# EAGLE board plantshield_huzzah_2022 (EAGLE 9.6.2)
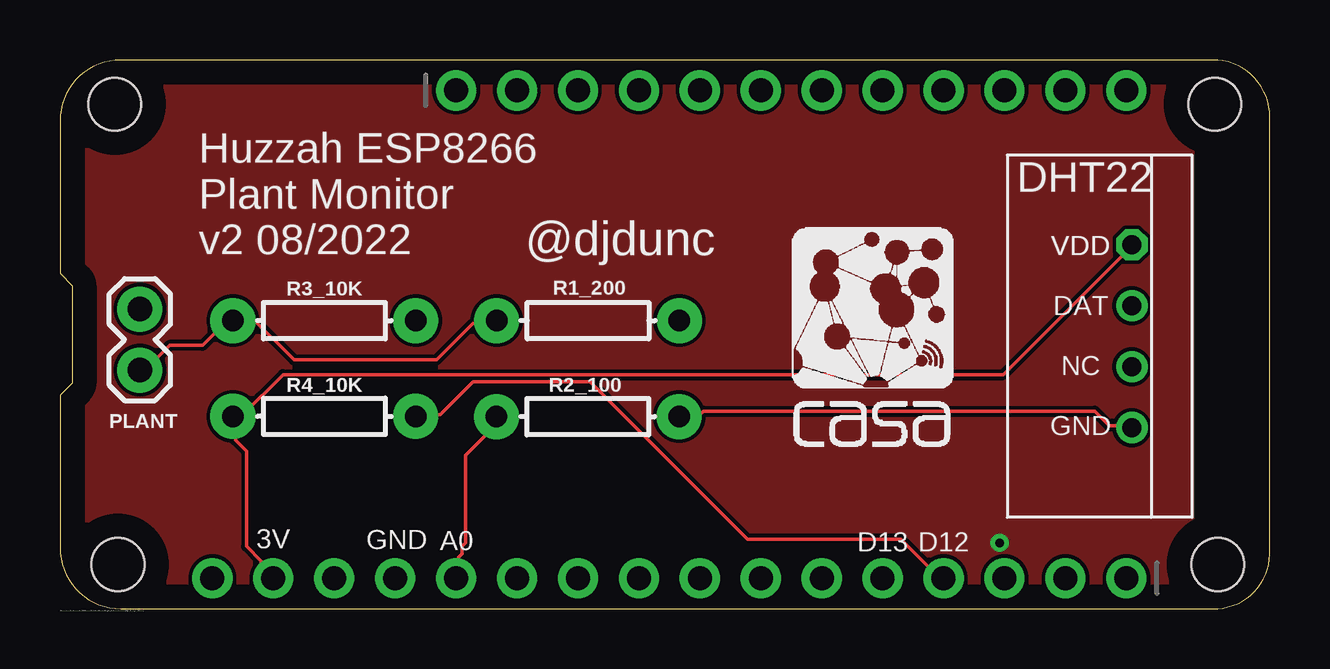
[diagram p0: board, top side]
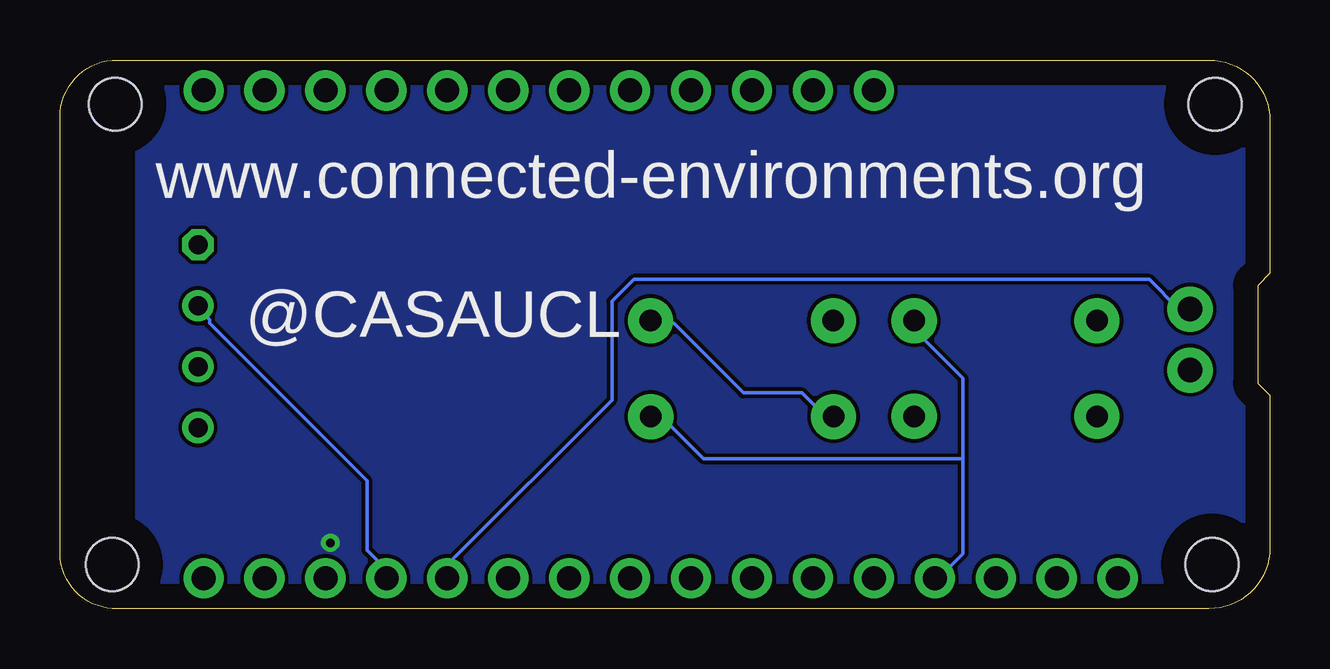
[diagram p1: board, bottom side, seen from below]

Size 50.43 x 22.86 mm. Coordinates in mm from the lower left corner, seen from the top.
Outline: 2.54,0 48.26,0 arc90 50.42,2.48 50.42,20.26 arc90 48.26,22.86 2.54,22.86 arc90 0,20.32 0,13.97 0.51,13.46 0.51,9.4 0,8.89 0,2.54 arc90 2.54,0
Copper layers (1*16): Top 0.035mm / dielectric 1.5mm / Bottom 0.035mm
Design rules "default": minimum track width 6mil, minimum drill 0.35mm, track to track 6mil, track to pad 6mil, pad to pad 6mil, via to via 6mil, smd to smd 6mil, copper to edge 40mil, drill to drill 6mil, minimum pad ring 10mil, minimum via ring 8mil, stop-mask expansion 4mil, vias tented up to drill 0mil, thermal gap 10mil
Holes 2.2 mm at 48.26,1.84 48.13,21.02 2.41,1.84 2.29,21.02

## Footprints (pad centres in the part's own frame; a part is rotated, then mirrored left to right if it is on the bottom)
RHT03_DHT-22 = drill 0.8: DATA -1.27,0; GND 3.81,0; NULL 1.27,0 | drill 0.8 octagon: VDD -3.81,0
1X16_ROUND = drill 1 pad 1.676: 1 -19.05,0; 2 -16.51,0; 3 -13.97,0; 4 -11.43,0; 5 -8.89,0; 6 -6.35,0; 7 -3.81,0; 8 -1.27,0; 9 1.27,0; 10 3.81,0; 11 6.35,0; 12 8.89,0; 13 11.43,0; 14 13.97,0; 15 16.51,0; 16 19.05,0
1X12_ROUND = drill 1 pad 1.676: 1 -13.97,0; 2 -11.43,0; 3 -8.89,0; 4 -6.35,0; 5 -3.81,0; 6 -1.27,0; 7 1.27,0; 8 3.81,0; 9 6.35,0; 10 8.89,0; 11 11.43,0; 12 13.97,0
1X02 = drill 1.016 pad 1.88: 1 0,0; 2 2.54,0
AXIAL-0.3 = drill 0.9 pad 1.88: P$1 -3.81,0; P$2 3.81,0

## Placement (x,y rotation side)
DHT22  [RHT03_DHT-22]  44.68,11.35 270 top
JP2  [1X16_ROUND]  25.4,1.27 180 top
JP4  [1X12_ROUND]  30.48,21.59 0 top
PLANT  [1X02]  3.33,9.94 90 top
R1_200  [AXIAL-0.3]  22.01,12 180 top
R2_100  100  [AXIAL-0.3]  22,8 180 top
R3_10K  10k  [AXIAL-0.3]  11.02,12 0 top
R4_10K  10k  [AXIAL-0.3]  11.02,8.01 0 top

## Library data of the parts
DHT22 = RHT03_DHT-22_AM2302; PROD_ID: SEN-10167
JP2 JP4 = microbuilder
PLANT = SparkFun-Connectors
R1_200 = SparkFun-Resistors
R2_100 = SparkFun-Resistors; PROD_ID: RES-12181
R3_10K R4_10K = SparkFun-Resistors; PROD_ID: RES-12183

## Nets
N$1: JP2.5 PLANT.2
N$2: DHT22.DATA JP2.4 R4_10K.P$2
N$3: JP2.12 R1_200.P$1 R2_100.P$2
N$4: DHT22.VDD JP2.15 R4_10K.P$1
N$5: PLANT.1 R1_200.P$2 R3_10K.P$1
N$6: DHT22.GND JP2.13 R2_100.P$1 R3_10K.P$2

## Tracks (layer width: path | path; a pad name or v marks a point on that pad's centre or on a via)
GND1  (via drill 0.35)
  other vias: 39.17,2.74
  pour Top: 0,23.48 0,0 47.18,0 47.18,23.48
  pour Bottom: -0.13,0.25 47.18,-0.02 47.18,23.48 0,23.48
N$1
  Bottom 0.152: JP2.5 34.29,1.83 27.43,8.69 27.43,12.8 26.52,13.72 5.03,13.72 3.81,12.5 3.35,12.5 PLANT.2
N$2
  Top 0.152: R4_10K.P$2 14.94,8.08 15.85,8.08 17.22,9.45 22.1,9.45 28.65,2.9 35.05,2.9 36.73,1.22 JP2.4
  Bottom 0.152: DHT22.DATA 44.65,12.5 44.2,12.04 44.2,11.89 37.64,5.33 37.64,2.44 36.88,1.68 36.88,1.37 JP2.4
N$3
  Top 0.152: JP2.12 16.61,1.37 16.61,2.13 16.76,2.29 16.76,2.59 16.92,2.74 16.92,6.4 18.14,7.62 18.14,7.92 R2_100.P$2
  Bottom 0.152: R1_200.P$1 25.76,11.89 24.84,11.89 21.95,8.99 19.51,8.99 18.59,8.08 18.29,8.08 R2_100.P$2
N$4
  Top 0.152: DHT22.VDD 44.65,15.09 39.32,9.75 9.3,9.75 7.62,8.08 7.32,8.08 R4_10K.P$1 7.32,7.92 7.32,7.01 7.77,6.55 7.77,2.59 8.38,1.98 8.38,1.83 8.84,1.37 JP2.15
N$5
  Top 0.152: PLANT.1 3.35,10.06 3.66,10.06 4.57,10.97 5.94,10.97 6.86,11.89 7.16,11.89 R3_10K.P$1 7.32,12.04 8.08,12.04 9.75,10.36 15.7,10.36 17.22,11.89 18.14,11.89 R1_200.P$2
N$6
  Top 0.152: DHT22.GND 44.65,7.62 43.74,7.62 43.13,8.23 26.82,8.23 26.67,8.08 25.91,8.08 R2_100.P$1
  Bottom 0.152: JP2.13 13.56,1.68 13.41,1.68 12.8,2.29 12.8,6.25 | 12.8,6.25 12.8,9.6 14.78,11.58 14.78,11.89 R3_10K.P$2 | 12.8,6.25 23.62,6.25 25.3,7.92 25.76,7.92 R2_100.P$1

## Text on the board
tPlace: Huzzah ESP8266 / Plant Monitor / v2 08/2022 | @djdunc | VDD | VDD | DAT | NC | GND | 3V | GND | A0 | D13 | D12 | /Users/dunc/Dropbox/code/CASA/casa0014/plantMonitor/Eagle/plantshieldv2022/CASA_CE_logo_BW.bmp
bPlace: www.connected-environments.org / / @CASAUCL